# EAGLE board Legoduino_topor (EAGLE 6.0), part 1 of 2
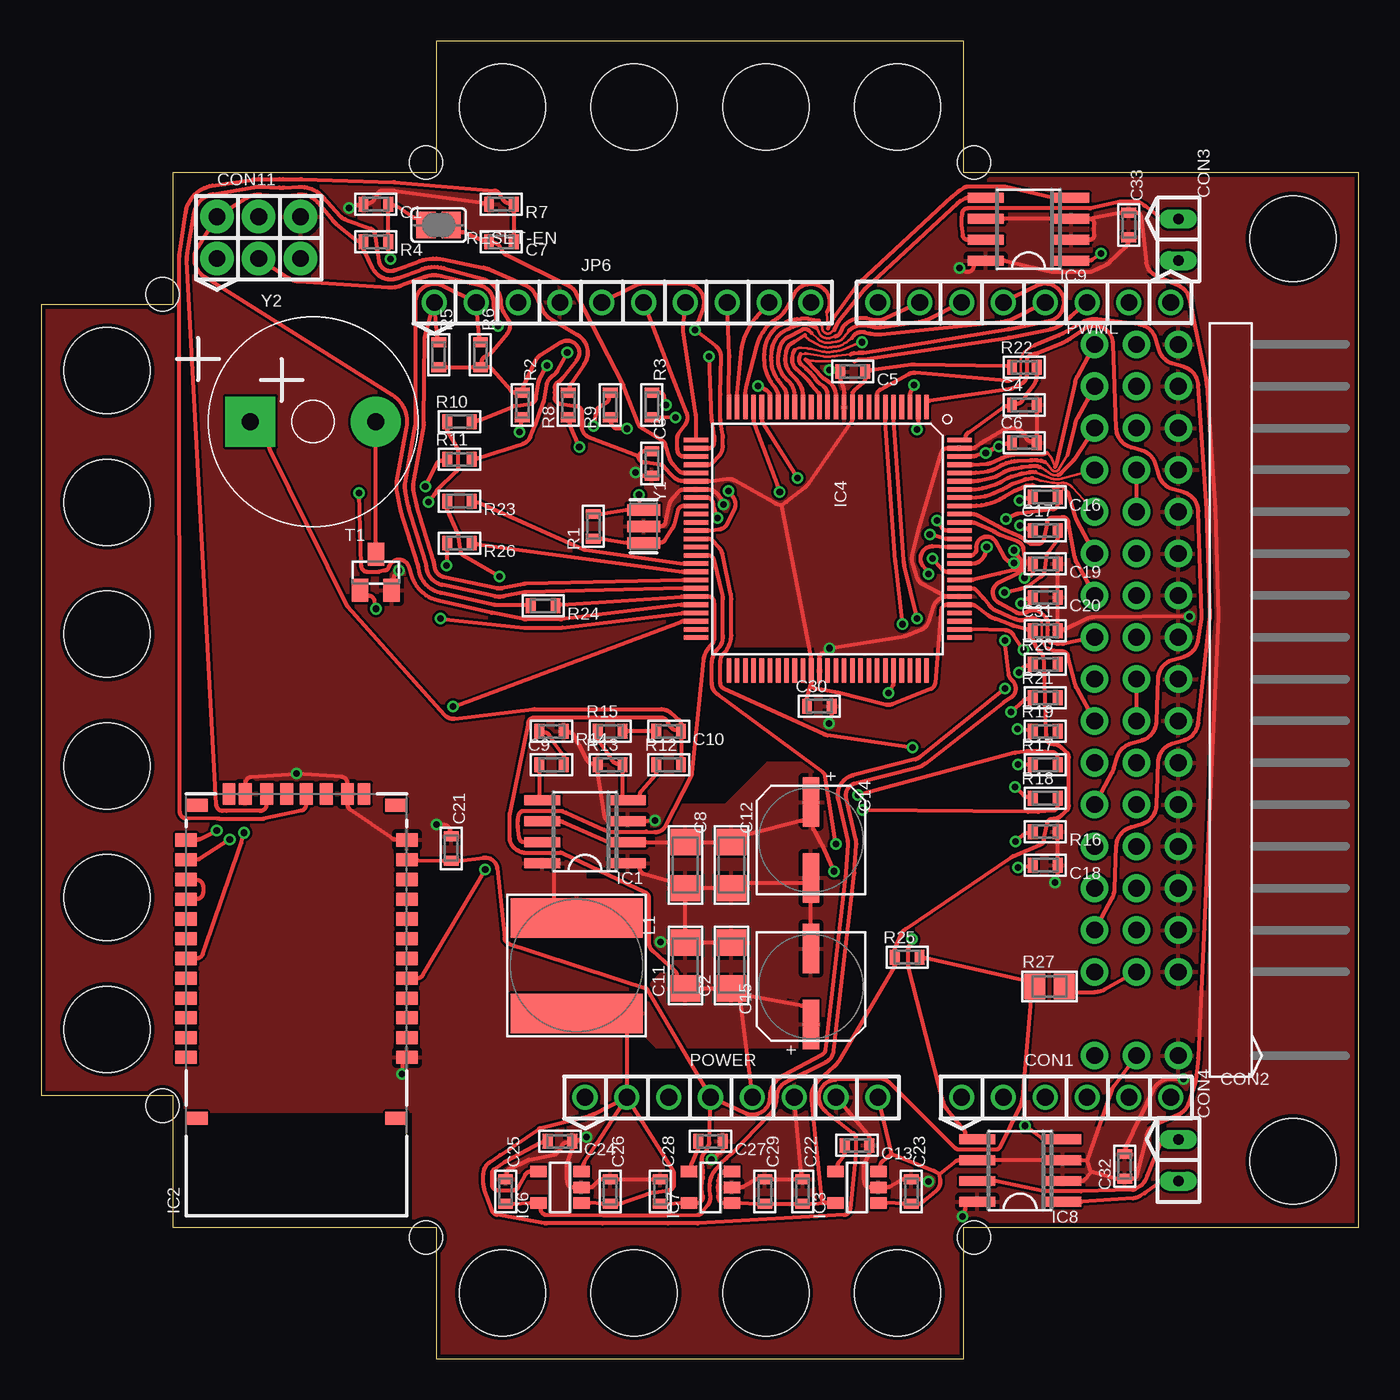
[diagram p0: board, top side]
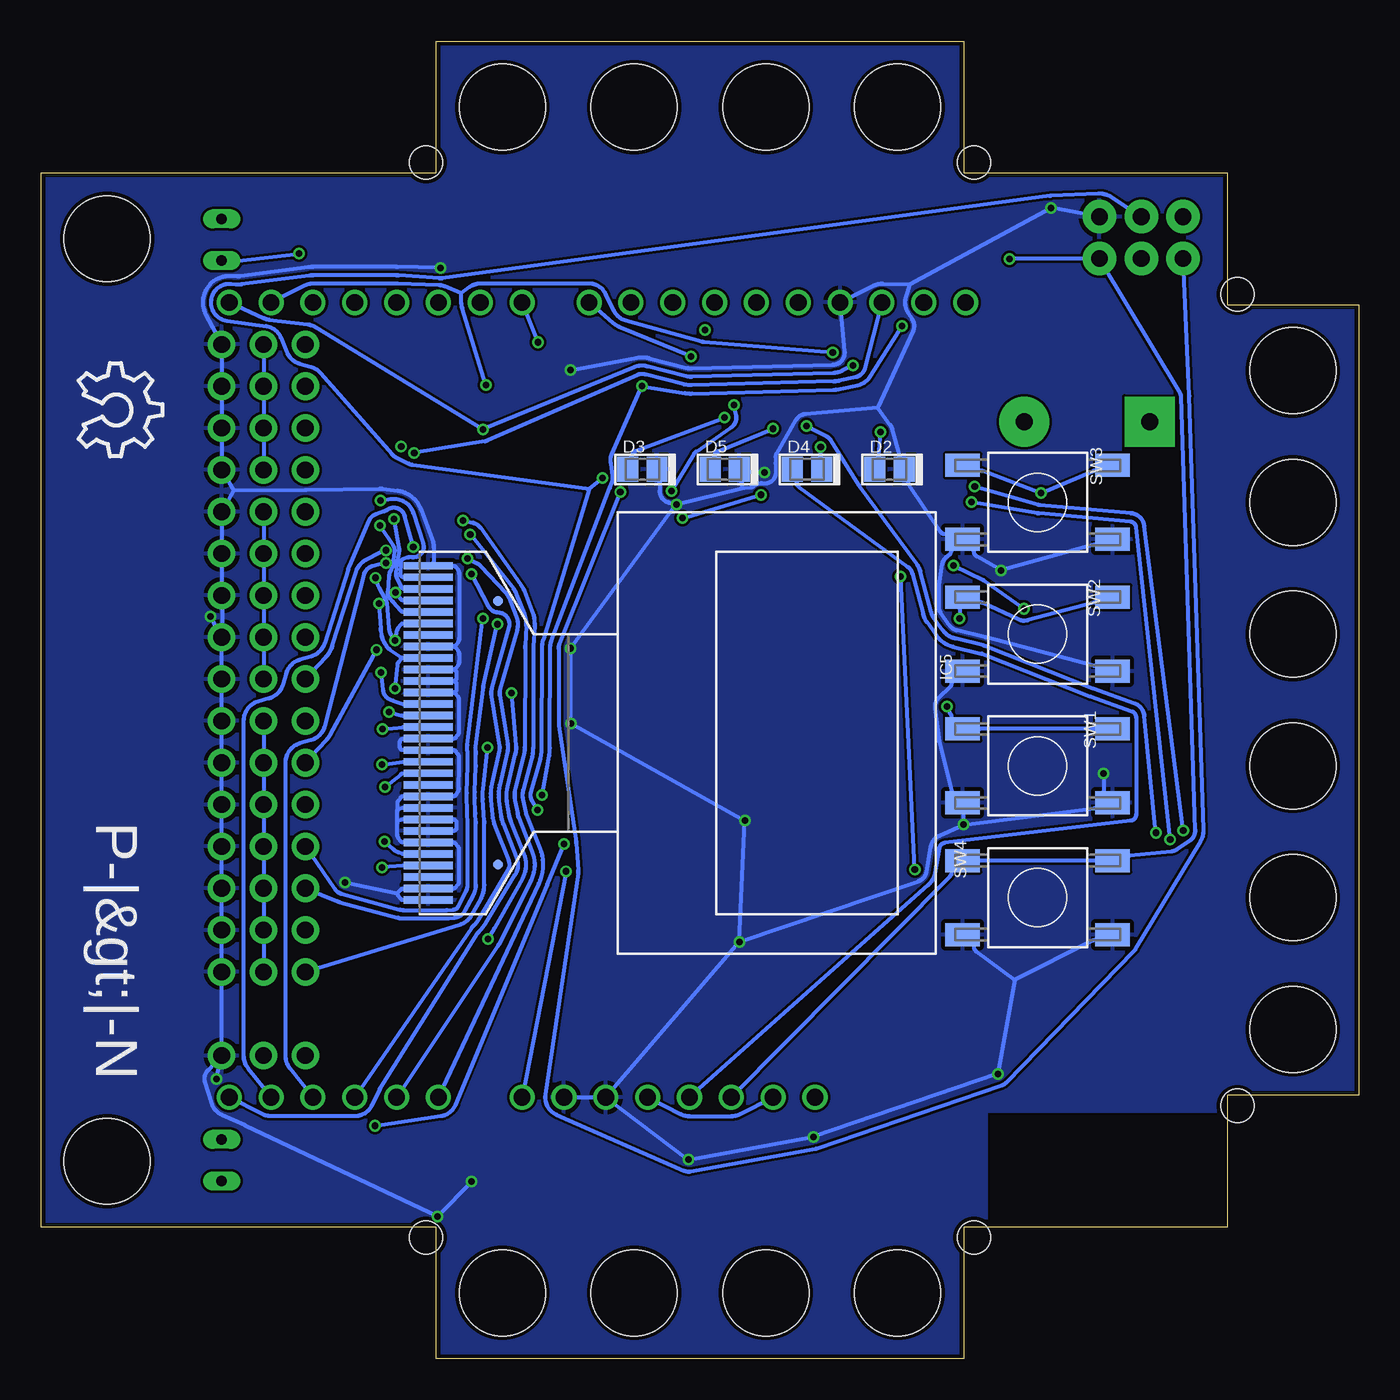
[diagram p1: board, bottom side, seen from below]

Size 80 x 80 mm. Coordinates in mm from the lower left corner, seen from the top.
Outline: 0,16 8,16 8,8 24,8 24,0 56,0 56,8 80,8 80,72 56,72 56,80 24,80 24,72 8,72 8,64 0,64 0,16
Copper layers 1+16: Top 0.035mm / dielectric 0.15mm / Bottom 0.035mm
Design rules: minimum track width 0.1524mm, track to track 0.1524mm, copper to edge 0.254mm, minimum pad ring 0.1mm, minimum via ring 0.1mm
Net classes: 0 default: width 0.152 mm, clearance 0.152 mm
Holes 2 mm at 7.37,64.64 23.36,72.64 56.63,72.64 56.63,7.37 23.36,7.37 7.37,15.37
Holes 5.2 mm at 28,4 36,4 44,4 52,4 4,20 4,28 4,36 4,44 4,52 4,60 28,76 36,76 44,76 52,76 76,68 76,12
tKeepout: area 24,0 to 56,8; area 24,72 to 56,80
bKeepout: area 24,72 to 56,80; area 24,0 to 56,8

## Footprints (pad centres in the part's own frame; a part is rotated, then mirrored left to right if it is on the bottom)
PN_default$ = smd 0.6 x 0.9: 1 -0.75,0; 2 0.75,0
PN_default$' = smd 1.6 x 1.8: 1 -1.4,0; 2 1.4,0
PN_default$'' = smd 3 x 1: + -2.3,0; - 2.3,0
pins$ = drill 1.016 pad 1.524: 1 -6.35,0; 2 -3.81,0; 3 -1.27,0; 4 1.27,0; 5 3.81,0; 6 6.35,0
PN_connector$ = drill 1.016 pad 1.676: 1 -21.59,-2.54; 2 -21.59,0; 3 -21.59,2.54; 4 -16.51,-2.54; 5 -16.51,0; 6 -16.51,2.54; 7 -13.97,-2.54; 8 -13.97,0; 9 -13.97,2.54; 10 -11.43,-2.54; 11 -11.43,0; 12 -11.43,2.54; 13 -8.89,-2.54; 14 -8.89,0; 15 -8.89,2.54; 16 -6.35,-2.54; 17 -6.35,0; 18 -6.35,2.54; 19 -3.81,-2.54; 20 -3.81,0; 21 -3.81,2.54; 22 -1.27,-2.54; 23 -1.27,0; 24 -1.27,2.54; 25 1.27,-2.54; 26 1.27,0; 27 1.27,2.54; 28 3.81,-2.54; 29 3.81,0; 30 3.81,2.54; 31 6.35,-2.54; 32 6.35,0; 33 6.35,2.54; 34 8.89,-2.54; 35 8.89,0; 36 8.89,2.54; 37 11.43,-2.54; 38 11.43,0; 39 11.43,2.54; 40 13.97,-2.54; 41 13.97,0; 42 13.97,2.54; 43 16.51,-2.54; 44 16.51,0; 45 16.51,2.54; 46 19.05,-2.54; 47 19.05,0; 48 19.05,2.54; 49 21.59,-2.54; 50 21.59,0; 51 21.59,2.54
pins$' = drill 0.635 pad 1.143 long: 1 -1.27,0; 2 1.27,0
Pietrucha$ = drill 1.016 pad 2.032: 1 -2.54,-1.27; 2 -2.54,1.27; 3 0,-1.27; 4 0,1.27; 5 2.54,-1.27; 6 2.54,1.27
PN_default$''' = smd 1.27 x 1.524: A -0.889,0; K 0.889,0
PN_IC$ = smd 0.6 x 2.2: 1 -1.905,-2.6; 2 -0.635,-2.6; 3 0.635,-2.6; 4 1.905,-2.6; 5 1.905,2.6; 6 0.635,2.6; 7 -0.635,2.6; 8 -1.905,2.6
PN_modules$ = smd 0.8 x 1.3: 1 -3.2,-6.7; 2 -2,-6.7; 3 -0.8,-6.7; 4 0.4,-6.7; 5 1.6,-6.7; 6 2.8,-6.7; 7 4,-6.7; 8 5.2,-6.7; 9 6.4,-6.7; 10 7.6,-6.7; 11 8.8,-6.7; 12 10,-6.7; 13 10,6.7; 14 8.8,6.7; 15 7.6,6.7; 16 6.4,6.7; 17 5.2,6.7; 18 4,6.7; 19 2.8,6.7; 20 1.6,6.7; 21 0.4,6.7; 22 -0.8,6.7; 23 -2,6.7; 24 -3.2,6.7; P$1 12.1,6.05; P$10 12.1,-6.05; P$35 -6.9,-6.05; P$36 -6.9,6.05 | smd 1.3 x 0.78: 28 12.8,3.1; 29 12.8,-3.1; 30 12.8,4.1; 35 12.8,-4.1 | smd 1.3 x 0.8: 31 12.8,1.8; 32 12.8,0.6; 33 12.8,-0.6; 34 12.8,-1.8
PN_IC$' = smd 0.7 x 1: 1 -0.95,-1.3; 2 0,-1.3; 3 0.95,-1.3; 4 0.95,1.3; 5 -0.95,1.3
PN_microcontrollers$ = smd 1.5 x 0.28: 1 -8,6; 2 -8,5.5; 3 -8,5; 4 -8,4.5; 5 -8,4; 6 -8,3.5; 7 -8,3; 8 -8,2.5; 9 -8,2; 10 -8,1.5; 11 -8,1; 12 -8,0.5; 13 -8,0; 14 -8,-0.5; 15 -8,-1; 16 -8,-1.5; 17 -8,-2; 18 -8,-2.5; 19 -8,-3; 20 -8,-3.5; 21 -8,-4; 22 -8,-4.5; 23 -8,-5; 24 -8,-5.5; 25 -8,-6; 51 8,-6; 52 8,-5.5; 53 8,-5; 54 8,-4.5; 55 8,-4; 56 8,-3.5; 57 8,-3; 58 8,-2.5; 59 8,-2; 60 8,-1.5; 61 8,-1; 62 8,-0.5; 63 8,0; 64 8,0.5; 65 8,1; 66 8,1.5; 67 8,2; 68 8,2.5; 69 8,3; 70 8,3.5; 71 8,4; 72 8,4.5; 73 8,5; 74 8,5.5; 75 8,6 | smd 0.28 x 1.5: 26 -6,-8; 27 -5.5,-8; 28 -5,-8; 29 -4.5,-8; 30 -4,-8; 31 -3.5,-8; 32 -3,-8; 33 -2.5,-8; 34 -2,-8; 35 -1.5,-8; 36 -1,-8; 37 -0.5,-8; 38 0,-8; 39 0.5,-8; 40 1,-8; 41 1.5,-8; 42 2,-8; 43 2.5,-8; 44 3,-8; 45 3.5,-8; 46 4,-8; 47 4.5,-8; 48 5,-8; 49 5.5,-8; 50 6,-8; 76 6,8; 77 5.5,8; 78 5,8; 79 4.5,8; 80 4,8; 81 3.5,8; 82 3,8; 83 2.5,8; 84 2,8; 85 1.5,8; 86 1,8; 87 0.5,8; 88 0,8; 89 -0.5,8; 90 -1,8; 91 -1.5,8; 92 -2,8; 93 -2.5,8; 94 -3,8; 95 -3.5,8; 96 -4,8; 97 -4.5,8; 98 -5,8; 99 -5.5,8; 100 -6,8
PN_opto$ = smd 0.45 x 3: 1 -10.15,-23; 2 -9.45,-23; 3 -8.75,-23; 4 -8.05,-23; 5 -7.35,-23; 6 -6.65,-23; 7 -5.95,-23; 8 -5.25,-23; 9 -4.55,-23; 10 -3.85,-23; 11 -3.15,-23; 12 -2.45,-23; 13 -1.75,-23; 14 -1.05,-23; 15 -0.35,-23; 16 0.35,-23; 17 1.05,-23; 18 1.75,-23; 19 2.45,-23; 20 3.15,-23; 21 3.85,-23; 22 4.55,-23; 23 5.25,-23; 24 5.95,-23; 25 6.65,-23; 26 7.35,-23; 27 8.05,-23; 28 8.75,-23; 29 9.45,-23; 30 10.15,-23 | smd 0.6 x 0.6: ALIGN1 -8,-18.75; ALIGN2 8,-18.75
pins$'' = drill 1.016 pad 1.524: 1 -11.43,0; 2 -8.89,0; 3 -6.35,0; 4 -3.81,0; 5 -1.27,0; 6 1.27,0; 7 3.81,0; 8 6.35,0; 9 8.89,0; 10 11.43,0
PN_inductor$ = smd 2.4 x 8: 1 -2.9,0; 2 2.9,0
pins$''' = drill 1.016 pad 1.524: 1 -8.89,0; 2 -6.35,0; 3 -3.81,0; 4 -1.27,0; 5 1.27,0; 6 3.81,0; 7 6.35,0; 8 8.89,0
PN_default$'''' = smd 1.27 x 1.524: 1 -0.889,0; 2 0.889,0
jumper$ = smd 1.168 x 1.6: 1 -0.762,0; 2 0.762,0
PN_default$''''' = smd 1.4 x 2.1: 1 -2.25,-4.55; 1A -2.25,4.55; 2 2.25,-4.55; 2A 2.25,4.55
PN_default$'''''' = smd 1 x 1.4: 1 -0.95,-1.1; 2 0.95,-1.1; 3 0,1.1
SmartPrj$ = smd 0.7 x 2: 1 -1,0; 2 0,0; 3 1,0
Pietrucha$' = drill 1.016 pad 3.048 square: + -3.81,0 | drill 1.016 pad 3.048: - 3.81,0

## Placement (x,y rotation side)
C1  22p  [PN_default$]  20.32,70.1 180 top
C2  22u  [PN_default$']  41.91,23.88 90 top
C3  100n  [PN_default$]  37.08,54.36 270 top
C4  100n  [PN_default$]  59.69,57.91 0 top
C5  100n  [PN_default$]  49.28,59.94 180 top
C6  100n  [PN_default$]  59.69,55.63 0 top
C7  100n  [PN_default$]  27.94,67.82 180 top
C8  22u  [PN_default$']  39.12,29.97 270 top
C9  3n9  [PN_default$]  30.99,36.07 0 top
C10  150p  [PN_default$]  38.1,38.1 180 top
C11  22u  [PN_default$']  39.12,23.88 90 top
C12  22u  [PN_default$']  41.91,29.97 270 top
C13  470p  [PN_default$]  49.53,12.95 180 top
C14  100u/25V  [PN_default$'']  46.74,31.5 270 top
C15  100u/25V  [PN_default$'']  46.74,22.61 90 top
C16  *  [PN_default$]  60.96,52.32 180 top
C17  *  [PN_default$]  60.96,50.29 0 top
C18  *  [PN_default$]  60.96,29.97 180 top
C19  *  [PN_default$]  60.96,48.26 180 top
C20  *  [PN_default$]  60.96,46.23 180 top
C21  100n  [PN_default$]  24.89,30.99 270 top
C22  2u2  [PN_default$]  46.23,10.16 270 top
C23  1u  [PN_default$]  52.83,10.16 270 top
C24  470p  [PN_default$]  31.5,13.21 180 top
C25  2u2  [PN_default$]  28.19,10.16 270 top
C26  1u  [PN_default$]  34.54,10.16 270 top
C27  470p  [PN_default$]  40.64,13.21 180 top
C28  2u2  [PN_default$]  37.59,10.16 270 top
C29  1u  [PN_default$]  43.94,10.16 270 top
C30  100n  [PN_default$]  47.24,39.62 0 top
C31  100n  [PN_default$]  60.96,44.2 0 top
C32  100n  [PN_default$]  65.79,11.68 90 top
C33  100n  [PN_default$]  66.04,68.83 270 top
CON1  [pins$]  62.23,15.88 0 top
CON2  [PN_connector$]  66.5,40 90 top
CON3  [pins$']  69.04,67.94 270 top
CON4  [pins$']  69.04,12.06 270 top
CON11  ISP-AVR  [Pietrucha$]  13.21,68.07 0 top
D2  PWR  [PN_default$''']  28.5,54 0 bottom
D3  LED  [PN_default$''']  43.5,54 0 bottom
D4  DATA  [PN_default$''']  33.5,54 0 bottom
D5  CONN  [PN_default$''']  38.5,54 0 bottom
IC1  NCP3170ADR2G  [PN_IC$]  33.02,32 90 top
IC2  RN-42  [PN_modules$]  15.5,21.5 90 top
IC3  MIC5205-5.0YM5  [PN_IC$']  49.53,10.41 90 top
IC4  ATMEGA2560-16AU  [PN_microcontrollers$]  47.75,49.78 270 top
IC5  UG-2864HSWEG01_SPI  [PN_opto$]  33.5,38 270 bottom
IC6  MIC5205-3.6YM5  [PN_IC$']  31.5,10.41 90 top
IC7  MIC5205-3.3YM5  [PN_IC$']  40.64,10.41 90 top
IC8  BD6221F-E2  [PN_IC$]  59.44,11.43 90 top
IC9  BD6221F-E2  [PN_IC$]  59.94,68.58 90 top
JP6  [pins$'']  35.31,64.14 0 top
L1  SRN8040-100M  [PN_inductor$]  32.51,23.88 270 top
LOGO1  [ohw-logo$]  77.72,60.45 270 bottom
POWER  [pins$''']  41.91,15.88 0 top
PWML  [pins$''']  59.69,64.14 180 top
R1  1M  [PN_default$]  33.53,50.55 90 top
R2  1k  [PN_default$]  29.21,57.91 270 top
R3  1k  [PN_default$]  37.08,57.91 270 top
R4  10k  [PN_default$]  20.32,67.82 180 top
R5  10k  [PN_default$]  24.13,60.96 270 top
R6  10k  [PN_default$]  26.67,60.96 270 top
R7  1k  [PN_default$]  27.94,70.1 180 top
R8  1k  [PN_default$]  32,57.91 90 top
R9  1k  [PN_default$]  34.54,57.91 90 top
R10  10k  [PN_default$]  25.4,56.9 0 top
R11  10k  [PN_default$]  25.4,54.61 0 top
R12  24k9  [PN_default$]  38.1,36.07 0 top
R13  4k75  [PN_default$]  34.54,36.07 0 top
R14  10k  [PN_default$]  30.99,38.1 180 top
R15  1k  [PN_default$]  34.54,38.1 0 top
R16  390k  [PN_default$]  60.96,32 180 top
R17  10k  [PN_default$]  60.96,36.07 0 top
R18  10k  [PN_default$]  60.96,34.04 0 top
R19  10k  [PN_default$]  60.96,38.1 0 top
R20  10k  [PN_default$]  60.96,42.16 0 top
R21  10k  [PN_default$]  60.96,40.13 0 top
R22  0R  [PN_default$]  59.69,60.2 0 top
R23  10k  [PN_default$]  25.4,52.07 180 top
R24  100k  [PN_default$]  30.48,45.72 180 top
R25  N.C.  [PN_default$]  52.58,24.38 0 top
R26  10k  [PN_default$]  25.4,49.53 180 top
R27  0R  [PN_default$'''']  61.21,22.61 0 top
RESET-EN  [jumper$]  24.13,68.83 180 top
SW1  [PN_default$''''']  19.5,36 270 bottom
SW2  [PN_default$''''']  19.5,44 270 bottom
SW3  [PN_default$''''']  19.5,52 270 bottom
SW4  RST  [PN_default$''''']  19.5,28 270 bottom
T1  [PN_default$'''''']  20.32,47.75 0 top
Y1  [SmartPrj$]  36.58,50.55 270 top
Y2  [Pietrucha$']  16.51,56.9 0 top

## Library data of the parts
C1 C3-C7 C9 C10 C13 C16-C33 R1-R26 = $0603
C2 C8 C11 C12 = $1206
C14 C15 = $CE_SMD6.3
CON1 = $PIN6X1C
CON2 = $PIN(1+16)X3_DS
CON3 CON4 = $PIN2X1B
CON11 = $PIN3X2
D2-D5 = $D0805
IC1 IC8 IC9 = $SO08
IC2 = $RN42
IC3 IC6 IC7 = $SOT23-5
IC4 = $TQFP100
IC5 = $UG-2864HSWEG01
JP6 = $PIN10X1C
L1 = $SRN8040
LOGO1 = $OSHW_10X200_NOTEXT
POWER PWML = $PIN8X1C
R27 = $0805
RESET-EN = $SJ
SW1-SW4 = $MICROSW_SMD
T1 = $SOT23
Y1 = $RESONATOR
Y2 = $BUZZER-HCM

## Nets
0: IC4.2 PWML.1 R10.2
1: IC4.3 PWML.2 R11.2
2: IC4.12 PWML.3
3: IC4.16 PWML.4
4: IC4.13 PWML.5
5: IC4.17 PWML.6
6: IC4.18 PWML.7
7: IC4.14 PWML.8
8: IC4.27 JP6.10
9: IC4.24 JP6.9
10: IC4.25 JP6.8
11: IC4.26 JP6.7
12: IC4.28 JP6.6
13: IC4.29 JP6.5
18: IC4.46 SW3.1 SW3.1A
19: IC1.7 IC4.45 R24.1
20: IC4.44 JP6.2 R6.1
21: IC4.43 JP6.1 R5.1
22: IC4.78
23: CON2.21 IC4.77
24: CON2.18 IC4.1
25: CON2.15 IC4.5
26: CON2.12 IC4.6
27: CON2.9 IC4.7
28: CON2.6 IC4.38
29: IC4.71 IC8.5
38: IC4.37 R3.1
42: IC4.42 R26.1
43: IC4.41 R23.1
44: IC4.40 IC8.4
46: IC4.23 IC9.4
50: CON11.1 IC4.22
51: CON11.4 IC4.21 R18.2
52: CON11.3 IC4.20 R17.2
70: R19.2
71: IC4.19 IC9.5
72: R20.2
73: R21.2
74: IC4.47 SW2.1 SW2.1A
75: IC4.48 SW1.1 SW1.1A
+3V3: C20.2 C21.2 C28.2 D4.A IC2.11 IC5.9 IC7.5 POWER.4
+3V6: C19.2 C25.2 IC5.6 IC6.5
+5V: C3.1 C5.1 C22.2 C29.2 C30.1 C31.1 CON11.2 IC3.5 IC4.10 IC4.31 IC4.61 IC4.80 IC7.1 IC7.3 R2.1 R4.2 R5.2 R6.2 R22.1 R24.2 R25.1
+5VP: C2.1 C10.1 C11.1 C15.+ C26.2 IC6.1 IC6.3 L1.2 POWER.2 POWER.5 R12.2 R25.2 R27.1 Y2.+
+5VP_O: CON2.5 CON2.8 CON2.11 CON2.14 CON2.17 CON2.20 CON2.23 CON2.26 CON2.29 CON2.32 CON2.35 CON2.38 CON2.41 CON2.44 CON2.47 CON2.50 R27.2
ADC0: CON1.1 IC4.89
ADC1: CON1.2 IC4.88
ADC2: CON1.3 IC4.87
ADC3: CON1.4 IC4.86
ADC4: CON1.5 IC4.85
ADC5: CON1.6 IC4.84
ADC6: CON2.27 IC4.83
ADC7: CON2.24 IC4.82
ADC8: CON2.51 IC4.97
ADC9: CON2.48 IC4.96
ADC10: CON2.45 IC4.95
ADC11: CON2.42 IC4.94
ADC12: CON2.39 IC4.93
ADC13: CON2.36 IC4.92
ADC14: CON2.33 IC4.91
ADC15: CON2.30 IC4.90
AREF: C6.1 IC4.98 JP6.3
AVCC: C4.1 IC4.100 R22.2
DTR: C7.1 IC2.33 R7.1
GND: C1.2 C2.2 C3.2 C4.2 C5.2 C6.2 C8.2 C11.2 C12.2 C13.1 C14.- C15.- C18.1 C19.1 C20.1 C21.1 C22.1 C23.1 C24.1 C25.1 C26.1 C27.1 C28.1 C29.1 C30.2 C31.2 C32.2 C33.2 CON2.1 CON2.4 CON2.7 CON2.10 CON2.13 CON2.16 CON2.19 CON2.22 CON2.25 CON2.28 CON2.31 CON2.34 CON2.37 CON2.40 CON2.43 CON2.46 CON2.49 CON11.6 D2.K D3.K D5.K IC1.1 IC1.3 IC2.1 IC2.12 IC2.28 IC2.29 IC3.2 IC4.11 IC4.32 IC4.62 IC4.81 IC4.99 IC5.1 IC5.8 IC5.10 IC5.11 IC5.12 IC5.16 IC5.17 IC5.21 IC5.22 IC5.23 IC5.24 IC5.25 IC5.29 IC5.30 IC6.2 IC7.2 IC8.8 IC9.8 JP6.4 POWER.6 POWER.7 R7.2 R13.1 R14.1 R16.1 SW1.2 SW1.2A SW2.2 SW2.2A SW3.2 SW3.2A SW4.2 SW4.2A T1.2 Y1.2
GND1: IC1.4 R12.1 R13.2 R15.1
N$1: IC2.14 R10.1
N$2: D3.A R3.2
N$3: D2.A R2.2
N$4: IC2.13 R11.1
N$5: IC2.31 R8.2
N$6: D4.K R8.1
N$7: D5.A R9.1
N$8: IC2.19 R9.2
N$9: C18.2 IC5.27
N$10: C9.1 IC1.5
N$11: C9.2 R14.2
N$12: IC5.26 R16.2
N$13: C10.2 R15.2
N$14: C16.1 IC5.3
N$15: C17.2 IC5.4
N$16: C16.2 IC5.2
N$17: C17.1 IC5.5
N$18: IC5.13 R20.1
N$19: IC5.15 R19.1
N$20: IC5.18 R17.1
N$21: IC5.19 R18.1
N$22: IC2.15 IC2.16
N$23: IC5.14 R21.1
N$24: C13.2 IC3.4
N$25: T1.3 Y2.-
N$26: R26.2 T1.1
N$27: IC2.5 R23.2
N$28: C24.2 IC6.4
N$29: CON3.2 IC9.1
N$30: CON4.2 IC8.1
N$31: C27.2 IC7.4
N$32: CON3.1 IC9.7
N$33: CON4.1 IC8.7
OC_PWM1: IC4.15
OC_PWM2: IC4.39
RESET: C1.1 C7.2 CON11.5 IC4.30 POWER.3 R4.1 RESET-EN.1 RESET-EN.2 SW4.1 SW4.1A
SW: IC1.8 L1.1
VCC: IC5.28
VIN: C8.1 C12.1 C14.+ C23.2 C32.1 C33.1 CON2.2 IC1.2 IC1.6 IC3.1 IC3.3 IC8.2 IC8.3 IC8.6 IC9.2 IC9.3 IC9.6 POWER.8
XTAL1: IC4.34 R1.1 Y1.3
XTAL2: IC4.33 R1.2 Y1.1

## Tracks (layer width: path | path; a pad name or v marks a point on that pad's centre or on a via)
0  (via drill 0.4 pad 0.7)
  Top 0.254: IC4.2 53.25,57.16 53.25,57.03 arc-7 53.25,56.99 v53.18,56.43 | R10.2 26.32,56.97 26.45,56.97 arc22 26.59,56.99 28.62,57.81 arc-14 28.71,57.84 29.71,57.98 arc73 30.04,58.3 30.17,59.18 arc-19 30.32,59.63 v30.7,60.32
  Bottom 0.254: v30.7,60.32 31.39,59.98 arc25 31.91,59.85 40.52,59.62 arc16 40.85,59.66 43.23,60.26 arc-37 44,60.21 v53.18,56.43 63.32,62.63 arc-24 63.81,62.8 66.17,63.09 arc17 66.47,63.18 PWML.1
1  (via drill 0.4 pad 0.7)
  Top 0.254: IC4.3 52.75,58.41 52.75,58.53 arc-26 52.79,58.69 v53,59.13 | R11.2 26.32,54.68 26.45,54.68 arc18 26.57,54.7 29.25,55.56 arc50 29.7,55.98 30.01,56.72 arc3 30.02,56.73 30.5,58.06 arc10 30.54,58.21 30.69,59.11 arc-48 31.08,59.7 31.09,59.71 arc29 31.34,59.98 v31.94,61.09
  Bottom 0.254: 54.51,64.71 55.48,65.11 arc-20 55.84,65.18 58.38,65.28 arc-2 58.42,65.28 63.5,65.28 arc-27 64.01,65.16 PWML.2 | v31.94,61.09 39.76,61.73 arc11 39.9,61.76 44.5,63.03 arc49 45.23,63.64 45.71,64.63 arc-64 46.74,65.28 53.34,65.28 arc-35 54,65.07 54.51,64.71 | v53,59.13 54.43,63.8 arc14 54.48,64.08 54.51,64.71
2
  Top 0.152: 46.42,60.67 arc-5 46.61,60.63 46.62,60.63 arc12 47.03,60.58 47.71,60.56 arc10 48.05,60.58 48.2,60.6 arc-7 48.22,60.6 48.82,60.62 arc-8 48.85,60.62 49.1,60.59 49.39,60.56
  Top 0.254: 49.39,60.56 49.61,60.66 arc-28 49.75,60.68 arc13 49.98,60.69 58.74,62 arc3 58.85,62.02 61.29,62.52 arc29 62.04,62.88 62.5,63.28 arc0 62.51,63.29 PWML.3 | IC4.12 48.25,58.41 48.25,58.53 arc11 48.24,58.66 48.23,58.7 arc34 48,59.14 47.86,59.28 arc18 47.59,59.48 | 47.59,59.48 | 47.59,59.48 arc-20 47.41,59.61 46.55,60.54 arc4 46.42,60.67
3
  Top 0.152: 46.37,62.17 46.37,62.17 arc27 46.47,62 arc16 46.66,61.85 47.18,61.55 arc40 47.97,61.42 47.97,61.42 arc-1 48,61.43 48.06,61.44 arc-2 48.1,61.44 48.28,61.46 arc23 48.66,61.58 48.77,61.65 arc15 49.23,61.99
  Top 0.254: 49.23,61.99 49.34,62.12 arc-65 49.98,62.34 50.33,62.25 arc20 51,62.2 58.54,63 arc21 58.93,63.11 PWML.4 | IC4.16 46.25,58.41 46.25,58.53 arc36 46.03,59.2 45.86,59.44 arc7 45.74,59.59 45.52,59.82 arc-51 45.2,60.84 45.24,61.12 arc-28 45.39,61.52 | 45.39,61.52 | 45.39,61.52 arc-26 45.54,61.65 | 45.54,61.65 | 45.54,61.65 arc4 45.73,61.76 46.37,62.17
4
  Top 0.152: 46.11,61 46.37,61.03 arc-16 46.47,61.03 arc-1 46.54,61.02 47.47,60.87 arc18 48.02,60.86 48.15,60.88 arc-4 48.19,60.88 48.3,60.89 arc1 48.32,60.9 arc1 48.34,60.9 49.14,60.99
  Top 0.254: 49.14,60.99 arc-25 49.34,61.05 49.66,61.09 arc-10 49.78,61.09 49.78,61.09 arc14 49.93,61.09 58.68,62.51 arc2 58.75,62.52 61.19,63.02 arc195 60.45,65.16 PWML.5 | IC4.13 47.75,58.41 47.75,58.53 arc54 47.49,59.05 47.27,59.22 arc-20 47.03,59.47 47.02,59.47 arc3 46.97,59.55 46.89,59.66 arc9 46.7,59.88 46.55,60.02 arc4 46.45,60.11 46.16,60.36 arc-71 46.04,60.82 46.11,61
5
  Top 0.152: 46.77,62.29 arc2 46.78,62.28 47.15,61.93 arc54 47.92,61.7 47.92,61.7 arc-1 47.94,61.7 48.01,61.71 arc-2 48.06,61.72 48.25,61.74 arc45 48.74,62.02 49.06,62.43
  Top 0.254: 49.06,62.43 arc-58 50.03,62.75 50.52,62.66 arc19 51.02,62.64 53.5,63 arc19 53.85,63.11 PWML.6 | IC4.17 45.75,58.41 45.75,58.53 arc13 45.73,58.68 45.71,58.79 arc37 45.34,59.39 | 45.34,59.39 | 45.34,59.39 arc-57 44.76,60.88 44.8,61.17 arc-28 45.04,61.77 | 45.04,61.77 | 45.04,61.77 arc-26 45.34,62.04 46.2,62.49 arc-71 46.62,62.43 46.77,62.29
6
  Top 0.152: 47.08,62.59 47.21,62.31 arc82 47.94,61.99 48.2,62.07
  Top 0.254: 48.2,62.07 48.24,62.08 arc-1 48.27,62.09 48.28,62.1 arc42 48.5,62.27 48.5,62.28 arc7 48.58,62.43 48.66,62.61 arc-19 48.74,62.73 arc-58 50.12,63.18 50.59,63.08 arc36 51.25,63.16 PWML.7 | IC4.18 45.25,58.41 45.25,58.53 arc36 45.13,58.91 44.88,59.26 arc4 44.82,59.32 arc-44 44.33,60.79 44.35,61.1 arc-32 44.68,62.03 44.68,62.03 arc-27 45.16,62.44 45.45,62.59 arc-12 45.87,62.74 46.2,62.83 arc-40 46.66,62.79 46.94,62.66 arc-5 46.97,62.64 46.98,62.64 arc8 47.04,62.61 47.08,62.59
7  (via drill 0.4 pad 0.7)
  Top 0.152: 45.75,61.26 45.92,61.35 arc-35 46.16,61.4 46.51,61.35 arc-1 46.52,61.35 arc-4 46.71,61.31 47.45,61.15 arc21 47.99,61.14 48.1,61.16 arc-3 48.15,61.16 48.29,61.18 arc17 48.66,61.27 arc0 48.67,61.28 49.5,61.63 arc-14 v49.83,61.72
  Top 0.254: IC4.14 47.25,58.41 47.25,58.53 arc41 47.22,58.62 | 47.22,58.62 | 47.22,58.62 arc-1 47.21,58.63 46.8,59.12 arc-7 46.7,59.25 46.7,59.26 arc14 46.49,59.5 45.87,60.07 arc-60 45.62,60.85 45.68,61.1 arc-23 45.75,61.26
  Bottom 0.254: v49.83,61.72 PWML.8
8  (via drill 0.4 pad 0.7)
  Top 0.254: IC4.27 40.38,55.28 40.5,55.28 arc81 40.86,55.59 40.88,55.73 arc9 40.88,55.78 40.88,55.92 arc9 40.88,55.98 40.73,56.9 arc-6 40.72,56.99 v40.55,60.86
  Bottom 0.254: v40.55,60.86 44.82,62.61 arc18 45.27,62.88 JP6.10
9
  Top 0.254: IC4.24 42.25,58.41 42.25,58.53 arc-6 42.26,58.62 42.5,61.06 arc-35 43.42,63.23 JP6.9
10
  Top 0.254: IC4.25 41.75,58.41 41.75,58.53 arc-1 41.75,58.56 41.79,60.84 arc3 41.79,60.91 JP6.8
11
  Top 0.254: IC4.26 39.76,55.8 39.76,55.92 39.76,57.15 arc9 39.74,57.34 38.98,62.35 arc-14 38.97,62.52 JP6.7
12
  Top 0.254: IC4.28 39.13,54.78 39,54.78 arc-81 38.65,55.09 38.62,55.23 arc-9 38.62,55.28 38.62,55.92 arc-36 38.69,56.15 39.11,56.72 arc57 39.2,57.42 JP6.6
13  (via drill 0.4 pad 0.7)
  Top 0.254: JP6.5 36.06,65.16 arc-27 36.58,65.28 39.12,65.28 arc-111 40.18,63.73 v39.7,62.46 41,61.43 arc-53 41.28,60.84 41.23,58.58 arc1 41.23,58.53 41.23,57.03 arc9 41.24,56.97 41.38,56.06 arc-9 41.39,55.92 41.39,55.42 arc-43 41.16,54.82 40.77,54.4 arc-47 40.5,54.28 40.38,54.28 IC4.29
18  (via drill 0.4 pad 0.7)
  Top 0.254: IC4.46 39.13,45.78 39,45.78 arc7 38.84,45.77 31.58,44.89 arc-7 31.53,44.89 29.43,44.89 arc-11 29.36,44.9 27.38,45.29 arc-2 27.32,45.3 24.11,46.03 arc-59 22.52,47.48 22.34,48.07 arc145 21.1,48.06 | 21.1,48.06 | 21.1,48.06 arc-60 20.89,47.86 20.52,47.78 arc-13 20.44,47.77 19.82,47.77 arc-88 19.44,48.14 v19.3,52.56
  Bottom 0.254: SW3.1 23.13,53.93 23,53.93 arc21 22.86,53.91 v19.3,52.56 16.15,53.9 arc23 16,53.93 15.87,53.93 SW3.1A
19
  Top 0.254: R24.1 31.4,45.79 31.53,45.79 arc4 31.55,45.79 38.88,46.28 arc-4 39,46.28 39.13,46.28 IC4.45 40.38,46.28 40.5,46.28 arc-81 40.86,45.98 40.88,45.84 arc-9 40.88,45.78 40.88,43.92 40.88,43.78 arc-20 40.86,43.65 40.81,43.53 arc-24 40.73,43.41 40.73,43.41 arc7 40.63,43.3 40.51,43.14 arc32 40.22,42.42 39.53,35.58 arc-21 39.49,35.44 37.91,32.36 arc-66 37.24,31.97 36.74,32 arc3 36.72,32 34.52,32 arc-23 34.39,32.03 34.18,32.12 arc-2 34.16,32.13 31.89,33.15 arc2 31.86,33.16 31.65,33.25 arc23 31.52,33.27 29.32,33.27 arc81 28.99,32.99 28.94,32.7 arc9 28.94,32.64 28.94,32.34 arc7 28.94,32.29 29.02,31.63 arc83 29.32,31.37 29.45,31.37 IC1.7
20
  Top 0.254: IC4.44 39.13,46.78 39,46.78 arc1 38.96,46.78 29.42,46.55 arc10 29.36,46.54 28.06,46.28 arc-24 27.56,46.29 24.35,46.98 arc-72 23.4,48.04 | 23.4,48.04 | 23.4,48.04 arc11 23.34,48.37 22.33,51.65 arc-6 22.3,51.76 22.11,52.7 arc-22 22.1,53.17 22.7,56.47 arc10 22.73,56.9 22.73,64.14 arc-117 24.39,65.16 JP6.2 26.6,62.04 arc-5 26.6,62.01 26.6,61.88 R6.1
21
  Top 0.254: IC4.43 39.13,47.28 39,47.28 arc1 38.95,47.28 29.41,47.06 arc10 29.26,47.04 27.96,46.78 arc-23 27.67,46.78 24.45,47.46 arc-72 23.89,48.09 arc11 23.81,48.5 22.81,51.8 arc-5 22.79,51.87 22.6,52.8 arc-22 22.6,53.08 23.2,56.38 arc10 23.24,56.86 23.3,62.01 arc-15 23.31,62.11 JP6.1 24.06,62.04 arc-5 24.06,62.01 24.06,61.88 R5.1
23  (via drill 0.4 pad 0.7)
  Top 0.254: v59.64,43.05 59.03,43.96 arc55 58.52,44.24 56.51,44.28 56.5,44.28 56.38,44.28 IC4.77
  Bottom 0.254: CON2.21 62.69,37.56 arc-14 62.44,37.9 v59.64,43.05
24
  Top 0.254: CON2.18 65.03,35.6 arc12 65.13,35.85 65.33,36.53 arc-57 66.16,37.36 66.84,37.56 arc71 67.72,38.68 67.82,41.32 arc-71 68.7,42.44 69.38,42.64 arc65 70.25,43.62 70.45,44.97 arc11 70.46,45.1 70.26,51.47 arc72 69.38,52.6 68.7,52.8 arc-57 67.87,53.63 67.67,54.31 arc57 66.84,55.14 66.16,55.34 arc-72 65.28,56.46 65.08,61.63 arc122 63.33,62.52 62.46,61.93 arc-12 61.98,61.67 60.5,61.06 arc-10 60.42,61.03 60.36,61.02 arc5 60.33,61.01 60.05,60.93 arc73 59.85,60.65 59.85,59.75 arc-53 59.6,59.26 59.41,59.12 arc-15 59.23,59.01 58.97,58.92 arc-10 58.89,58.89 58.82,58.88 arc-3 58.77,58.87 53.95,58.16 arc-8 53.89,58.15 53.77,58.15 IC4.1
25  (via drill 0.4 pad 0.7)
  Top 0.254: v53.18,44.96 52.41,48.19 arc-9 52.37,48.47 51.75,57.01 arc-4 51.75,57.03 51.75,57.16 IC4.5
  Bottom 0.254: CON2.15 62.16,28.51 arc-40 61.75,28.22 58.22,27.27 arc-15 58,27.24 55.38,27.24 arc-3 55.36,27.25 54.98,27.27 arc-59 54.68,27.46 54.21,28.37 arc-27 54.11,28.77 54.11,32.52 arc-3 54.11,32.58 54.14,33.07 arc2 54.15,33.24 54.16,34.15 arc3 54.16,34.37 54.11,36 arc-2 54.11,36.02 54.11,36.73 arc-6 54.12,36.81 54.13,36.99 arc13 54.13,37.26 v53.18,44.96
26  (via drill 0.4 pad 0.7)
  Top 0.254: v52.3,44.6 51.87,48.33 arc-3 51.86,48.43 51.25,56.97 arc-4 51.25,57.03 51.25,57.16 IC4.6
  Bottom 0.254: CON2.12 62.03,27.78 arc-7 61.88,27.73 58.35,26.78 arc-15 58,26.74 55.38,26.74 arc-6 55.28,26.74 54.91,26.78 arc-55 54.26,27.22 53.77,28.11 arc-29 53.6,28.77 53.6,32.52 arc-3 53.6,32.6 53.63,33.1 arc1 53.63,33.14 53.67,34.05 arc5 53.67,34.42 53.6,35.96 arc-3 53.6,36.02 53.6,36.73 arc-6 53.61,36.87 53.63,37.04 arc13 53.62,37.2 53.17,40.66 arc5 53.15,40.81 v52.3,44.6
27
  Top 0.152: 60.31,61.53 60.04,61.39 arc8 59.94,61.32 59.75,61.18 arc53 59.48,60.65 59.48,59.75 arc-73 59.31,59.52 59.04,59.43 arc-8 58.99,59.42 58.79,59.39
  Top 0.254: 58.79,59.39 58.72,59.38 arc-17 58.61,59.37 53.06,59.86 arc33 52.65,59.77 50.94,58.85 arc62 50.75,58.53 50.75,58.41 IC4.7 | CON2.9 65.03,27.98 arc26 65.18,28.52 65.28,31.16 arc-71 66.16,32.28 66.84,32.48 arc71 67.72,33.6 67.82,36.24 arc-71 68.7,37.36 69.38,37.56 arc67 70.25,38.59 70.96,44.94 arc8 70.97,45.12 70.77,51.48 arc2 70.76,51.55 70.26,59.13 arc70 69.38,60.22 68.7,60.42 arc-57 67.87,61.25 67.67,61.93 arc67 66.65,62.8 64.15,63.12 arc37 63.2,62.93 62.03,62.26 arc-7 61.78,62.14 60.31,61.53
28  (via drill 0.4 pad 0.7)
  Top 0.254: v52.9,37.11 47.73,37.86 arc-16 47.54,37.91 41.45,40.69 arc-66 41.23,41.03 41.23,42.28 arc-12 41.24,42.36 41.29,42.6 arc-36 41.39,42.78 41.4,42.78 arc25 41.74,43.26 41.79,43.38 arc23 41.9,43.92 41.9,46.14 arc12 41.87,46.43 41.37,48.83 arc31 41.16,49.25 40.77,49.67 arc47 40.5,49.78 40.38,49.78 IC4.38
  Bottom 0.254: CON2.6 54.61,26.35 arc-43 53.84,26.96 53.35,27.83 arc-30 53.09,28.77 53.09,32.52 arc-4 53.1,32.65 53.19,33.99 arc10 53.17,34.62 v52.9,37.11
29  (via drill 0.4 pad 0.7)
  Top 0.254: v51.44,40.43 51.7,40.84 arc32 51.75,41.03 51.75,41.16 IC4.71 | IC8.5 56.12,13.51 56.12,13.63 arc39 56.03,13.88 54.99,15.15 arc-25 54.77,15.59 52.66,23.84 arc-14 52.65,23.93 52.65,24.83 arc-22 52.67,24.98 v52.88,25.48
  Bottom 0.254: v52.88,25.48 52.49,26.12 arc-1 52.46,26.19 50.77,29.16 arc-51 50.67,30.63 51.48,32.66 arc13 51.59,33.04 51.72,33.9 arc23 51.68,34.75 51.2,36.69 arc-19 51.16,37.26 v51.44,40.43
38  (via drill 0.4 pad 0.7)
  Top 0.254: v37.94,57.91 37.83,58.43 arc78 37.53,58.66 37.41,58.66 R3.1 | IC4.37 40.38,50.28 40.5,50.28 arc6 40.54,50.29 41.14,50.35 arc57 41.68,50.73 42.09,51.56 arc64 42.01,52.33 v41.72,52.7
  Bottom 0.254: v41.72,52.7 40.35,54.96 arc24 40.24,55.08 38.1,56.55 arc-68 37.81,57.31 v37.94,57.91
42
  Top 0.254: R26.1 26.32,49.46 26.45,49.46 arc-8 26.5,49.46 38.92,47.79 arc8 39,47.78 39.13,47.78 IC4.42
43
  Top 0.254: R23.1 26.32,52 26.45,52 arc-24 26.61,51.97 32.92,49.15 arc16 33.02,49.12 38.98,48.28 arc8 39,48.28 39.13,48.28 IC4.41
44  (via drill 0.4 pad 0.7)
  Top 0.254: v48.25,31.26 47.61,35.35 arc45 47.46,35.6 41.08,40.32 arc-54 40.72,41.03 40.72,42.28 arc-24 40.8,42.64 40.9,42.86 arc-21 41.06,43.09 41.13,43.16 arc43 41.38,43.75 41.39,43.89 arc2 41.39,43.92 41.39,46.14 arc13 41.37,46.35 40.85,48.51 arc77 40.5,48.78 40.38,48.78 IC4.40 | IC8.4 61.06,13.34 60.94,13.34 arc-36 60.76,13.39 v59.72,14.15
  Bottom 0.254: v59.72,14.15 55.71,14.74 arc-59 54.83,15.44 49.28,28.76 arc0 49.27,28.78 v48.25,31.26
46
  Top 0.152: 47.71,63.55 47.76,62.63 arc-5 47.76,62.57
  Top 0.254: IC9.4 61.57,70.48 61.44,70.48 arc-13 61.38,70.49 58.53,71.16 arc13 58.44,71.17 56.24,71.17 arc32 56.04,71.11 55.77,70.94 arc9 55.66,70.86 55.33,70.57 arc2 55.3,70.54 49.68,65.35 arc12 49.46,65.1 48.06,63.14 arc11 47.94,62.94 47.85,62.74 arc-6 47.82,62.67 arc2 47.81,62.66 47.76,62.57 | IC4.23 42.75,58.41 42.75,58.53 arc-9 42.76,58.59 42.84,59.16 arc-6 42.86,59.23 43.43,61.45 arc-26 44.08,62.69 44.09,62.69 arc-21 44.71,63.19 | 44.71,63.19 | 44.71,63.19 arc32 45.13,63.61 45.75,64.69 arc-181 47.71,63.55
50  (via drill 0.4 pad 0.7)
  Top 0.254: IC4.22 43.25,57.16 43.25,57.03 arc20 43.31,56.73 v44.84,52.63
  Bottom 0.254: v44.84,52.63 48.54,43.41 arc-22 48.59,43.14 48.57,38.58 arc-8 48.56,38.47 47.53,31.37 arc4 47.52,31.31 47.4,29.65 arc13 47.41,29.49 49.39,16.04 arc-75 48.72,14.83 40.99,11.43 arc-34 40.57,11.38 32.99,12.75 arc-9 32.88,12.78 21.67,16.61 arc-27 21.39,16.79 13.63,24.79 arc-13 13.57,24.85 9.6,31.43 arc-33 9.42,32.11 10.29,58.45 arc-1 10.29,58.46 CON11.1
51  (via drill 0.4 pad 0.7)
  Top 0.254: R18.2 61.71,33.71 61.71,33.59 arc-85 61.44,33.29 60.54,33.21 arc-5 60.51,33.2 59.91,33.2 v49.86,33.31 | IC4.21 43.75,57.16 43.75,57.03 arc32 43.81,56.84 v45.92,53.47
  Bottom 0.254: 46.71,52.82 v45.92,53.47 | 46.71,52.82 49.53,43.65 arc-17 49.61,43.15 49.63,37.1 arc16 49.76,36.21 50.27,34.42 arc-47 50.2,33.87 v49.86,33.31 | CON11.4 14.98,70.51 arc-36 15.81,70.74 18.71,70.61 arc-5 18.78,70.6 55.67,65.6 arc12 55.81,65.59 58.3,65.78 arc-4 58.42,65.79 63.5,65.79 arc-7 63.72,65.77 67.85,65.23 arc13 68.17,65.22 68.48,65.25 arc-177 68.73,63.02 66.35,62.7 arc60 65.46,62.02 65.08,61.12 arc-51 64.3,60.42 63.62,60.22 arc32 63.05,59.86 58.69,54.91 arc-22 58.46,54.73 57.67,54.34 arc-19 57.45,54.28 46.71,52.82
52  (via drill 0.4 pad 0.7)
  Top 0.254: v27.73,62.71 27.5,63.84 arc-11 27.47,64.14 arc77 26.66,65.16 24.26,65.74 arc34 23.31,65.69 21.82,65.14 arc-24 21.1,65.04 15.65,65.41 arc-29 14.98,65.64 CON11.3 | R17.2 61.71,36.39 61.71,36.52 arc85 61.44,36.82 60.54,36.9 arc5 60.51,36.9 59.91,36.9 arc8 59.86,36.9 59.2,36.8 arc7 59.11,36.79 v49.59,34.23 | IC4.20 44.25,58.41 44.25,58.53 arc42 44.22,58.63 44.12,58.74 arc17 44.05,58.79 43.94,58.86 arc5 43.92,58.87 v43.53,59.06
  Bottom 0.254: v27.73,62.71 29.65,59.66 arc46 30.44,59.11 31.46,58.89 arc11 31.88,58.84 40.49,58.61 arc11 40.91,58.63 v43.53,59.06 45.37,54.92 arc-24 45.41,54.76 45.41,54.38 arc-8 45.4,54.33 45.3,53.58 45.3,53.57 | v49.59,34.23 49.18,36.42 arc-10 49.12,37.1 49.1,43.15 arc21 49.02,43.58 45.48,52.87 45.48,52.88 45.34,53.24 arc-31 45.3,53.57 | 45.3,53.57
71
  Top 0.152: 47.21,63.03 47.37,62.77 arc-22 47.42,62.65 47.44,62.52 arc119 47.96,62.31 48.16,62.47
  Top 0.254: IC9.5 56.37,70.48 56.24,70.48 arc28 56.1,70.45 55.82,70.3 arc14 55.64,70.17 50.02,64.97 arc9 49.91,64.85 48.4,62.95 arc15 48.29,62.76 48.16,62.47 | IC4.19 44.75,58.41 44.75,58.53 arc24 44.74,58.59 44.62,58.86 arc12 44.53,59.01 44.41,59.17 arc-36 43.91,60.66 43.91,60.99 arc-36 44.33,62.29 | 44.33,62.29 | 44.33,62.29 arc-30 45.02,62.86 45.23,62.95 arc-18 45.88,63.13 46.16,63.16 arc-4 46.32,63.17 46.33,63.17 arc-13 46.55,63.15 47.16,63.04 arc-6 47.21,63.03
74  (via drill 0.4 pad 0.7)
  Top 0.254: v24.24,44.94 29.33,44.39 arc6 29.43,44.38 31.53,44.38 arc7 31.64,44.39 38.9,45.28 arc-7 39,45.28 39.13,45.28 IC4.47
  Bottom 0.254: SW2.1A 15.87,45.93 16,45.93 arc-15 16.1,45.92 20.13,44.83 arc40 20.63,44.88 22.84,45.9 arc-25 23,45.93 23.13,45.93 SW2.1 24.24,45.68 24.24,45.55 v24.24,44.94
75  (via drill 0.4 pad 0.7)
  Top 0.254: v25.01,39.6 38.88,44.76 arc-20 39,44.78 39.13,44.78 IC4.48
  Bottom 0.254: SW1.1A 15.87,38.25 16,38.25 23,38.25 23.13,38.25 SW1.1 24.72,38.82 24.72,38.95 arc-28 24.76,39.13 v25.01,39.6
+3V3  (via drill 0.4 pad 0.7)
  Top 0.254: v58.53,40.7 53.36,36.54 arc-24 53.08,36.4 49.28,35.43 arc89 48.38,33.95 48.96,31.42 arc-17 48.98,31.21 48.86,29.55 arc-2 48.86,29.52 47.61,18.76 arc-55 47.42,18.47 45.02,17.18 arc62 44.24,15.88 arc-115 42.74,14.91 POWER.4 | IC2.11 22.72,30.28 22.85,30.28 arc-2 22.86,30.28 24.43,30.24 24.44,30.24 24.57,30.24 C21.2 25.21,30.24 25.34,30.24 arc7 25.38,30.24 26.87,30.43 arc-91 27.69,29.78 28.13,25.54 arc66 28.39,25.21 36.63,22.54 arc-42 36.84,22.37 POWER.4 | C28.2 37.91,9.41 38.04,9.41 arc4 38.06,9.41 38.82,9.46 arc-4 38.84,9.46 38.97,9.46 IC7.5 39.71,9.46 39.84,9.46 39.93,9.49 arc84 40.17,9.87 40.12,10.17 arc-21 40.12,10.65 40.17,10.95 arc10 40.18,11.01 arc-2 40.18,11.05 40.19,11.35 arc8 40.18,11.4 40.11,12.03 arc-59 40.34,12.57 | 40.34,12.57 | 40.34,12.57 arc31 40.41,12.67 40.54,13 arc20 40.57,13.13 POWER.4 | C20.2 60.04,46.16 59.91,46.16 arc54 59.6,46 v59.5,45.86
  Bottom 0.254: v59.5,45.86 59.39,44.33 arc-5 59.38,44.21 59.34,43.96 arc-26 59.12,43.41 arc8 59.08,43.33 arc-30 58.86,43.09 58.13,42.59 arc-34 58,42.55 | 58,42.55 57.87,42.55 | 57.87,42.55 IC5.9 57.87,42.55 | 57.87,42.55 58,42.55 | 58,42.55 arc-51 58.18,42.47 58.3,42.31 arc-33 58.38,42.12 v58.53,40.7 | D4.A 34.13,53.37 34.13,53.24 arc-54 33.98,52.93 27.39,48.09 arc39 27.11,47.69 26.45,45.19 arc-20 26.24,44.74 25.67,43.93 arc-41 24.65,43.24 22.91,42.82 arc8 22.86,42.8 16.33,40.22 arc-2 16.3,40.21 13.77,39.31 arc70 13.52,38.95 13.52,33.05 arc83 13.86,32.67 25.14,31.33 arc-73 25.48,31.02 25.74,29.49 arc39 26.14,28.77 POWER.4
+3V6  (via drill 0.4 pad 0.7)
  Top 0.254: C25.2 28.52,9.41 28.64,9.41 arc3 28.66,9.41 29.68,9.46 arc-3 29.7,9.46 29.82,9.46 IC6.5 30.32,9.24 30.32,9.11 arc90 30.7,8.73 34.09,8.73 | 34.09,8.73 | 34.09,8.73 38.04,8.73 39.84,8.73 arc53 40.15,8.89 40.48,9.34 arc43 40.64,9.9 40.59,10.32 arc-13 40.59,10.52 40.64,10.87 arc-23 40.74,11.17 40.85,11.36 arc-12 40.93,11.47 41.14,11.7 arc14 41.22,11.82 41.23,11.83 arc-21 41.28,11.9 41.6,12.17 41.94,12.47 arc5 41.96,12.49 44.24,14.84 arc44 44.66,15.88 arc-64 45.25,16.82 47.63,18.01 arc57 48.12,18.7 49.36,29.46 arc2 49.37,29.51 49.49,31.17 arc17 49.46,31.54 48.88,34.07 arc-89 49.41,34.94 53.21,35.91 arc24 53.66,36.13 58.42,39.85 arc-4 58.47,39.88 58.89,40.16 arc106 58.95,41.19 | 58.95,41.19 | 58.95,41.19 arc-43 58.73,41.61 v58.51,43.61 | C19.2 60.21,47.94 60.21,47.81 arc-71 60.01,47.53 v59.7,47.42
  Bottom 0.254: IC5.6 57.87,44.65 58,44.65 arc-51 58.18,44.56 58.3,44.41 arc-27 58.37,44.25 v58.51,43.61 v58.52,43.62 arc17 58.65,43.79 58.76,43.97 arc26 58.89,44.35 59.02,45.9 arc-28 59.1,46.12 59.1,46.12 arc4 59.13,46.16 59.5,46.84 arc20 v59.7,47.41 v59.7,47.42
+5V
  Top 0.254: 36.24,54.82 36.41,55.01 arc-48 36.63,55.11 36.76,55.11 C3.1 | 60.71,42.87 arc-42 60.83,42.66 60.89,42.29 arc-7 60.89,42.24 61.03,37.89 arc9 61.03,37.84 61.08,37.59 arc80 61.41,37.31 arc-44 61.96,37.09 62.27,36.79 arc-46 62.39,36.52 62.39,33.59 arc-46 62.27,33.31 61.96,33.01 arc-44 61.41,32.79 arc79 61.08,32.52 60.88,31.48 arc-56 60.66,31.2 59.02,30.51 arc11 58.89,30.45 52.47,26.09 arc32 52.21,25.77 51.85,24.95 arc24 51.83,24.83 51.83,24.71 R25.1 51.83,24.06 51.83,23.93 arc-30 51.79,23.78 48.44,18.1 arc-18 48.16,17.76 47.28,16.99 arc54 46.79,15.73 47.38,9.78 arc84 47.73,9.46 | 60.71,42.87 | 60.71,42.87 arc-28 60.38,43.3 60.23,43.63 arc-24 60.21,43.75 60.21,43.87 C31.1 60.04,44.27 59.91,44.27 arc-16 59.8,44.28 59.1,44.49 arc-7 58.92,44.55 arc4 58.86,44.58 57.91,44.92 arc-17 57.48,45.15 56.72,45.71 arc36 56.5,45.78 56.38,45.78 IC4.80 55.13,45.78 55,45.78 arc81 54.65,45.48 54.62,45.34 arc4 54.62,45.31 54.27,41 arc-64 54.03,40.68 51.71,39.75 arc-36 51.26,39.72 48.39,40.44 arc4 48.36,40.45 47.05,40.68 arc-80 46.75,41.03 | R24.2 29.56,45.75 29.43,45.75 27.82,45.75 arc-13 27.44,45.8 24.23,46.51 arc-72 22.92,47.99 | 22.92,47.99 | 22.92,47.99 arc12 22.87,48.23 21.84,51.49 arc-6 21.8,51.66 21.61,52.6 arc-22 21.6,53.26 22.2,56.56 arc68 21.33,58.51 9.95,65.66 arc-90 9.52,67.53 CON11.2 12.49,70.49 arc-37 13.31,70.69 14.37,70.61 arc4 14.48,70.6 14.69,70.6 arc6 14.83,70.61 15.62,70.69 arc-56 16.78,70.21 17.73,69.08 arc10 17.89,68.93 19.03,67.98 arc40 19.27,67.89 19.4,67.89 R4.2 19.57,67.5 19.57,67.37 arc27 19.6,67.23 20.11,66.22 arc83 21.65,65.62 23.13,66.16 arc-36 24.45,66.22 26.81,65.56 arc-75 27.9,64.14 arc31 28.05,63.58 28.35,63.09 arc-71 28.3,62.25 27.41,61.17 arc-19 27.32,61.09 26.92,60.83 arc58 26.74,60.51 26.74,60.38 R6.2
  Top 0.254: C30.1 46.49,39.95 46.49,40.07 arc-17 46.51,40.16 46.74,40.93 arc17 46.75,41.03 | 46.75,41.03 46.75,41.16 | 46.75,41.16 IC4.61 | IC7.3 41.57,11.36 41.44,11.36 41.33,11.28 arc-4 41.28,11.24 | 41.28,11.24 | 41.28,11.24 arc41 41.17,11.08 41.11,10.85 arc11 41.1,10.79 41.08,10.44 arc6 41.08,10.4 41.1,9.88 arc-3 41.1,9.81 arc74 41.35,9.49 41.44,9.46 41.57,9.46 IC7.1 42.31,9.46 42.44,9.46 arc-3 42.46,9.46 43.48,9.41 arc3 43.49,9.41 43.62,9.41 C29.2 44.27,9.41 44.39,9.41 45.78,9.41 45.91,9.41 C22.2 46.55,9.41 46.68,9.41 arc3 46.69,9.41 47.71,9.46 arc-3 47.73,9.46 | 47.73,9.46 47.86,9.46 | 47.86,9.46 IC3.5 47.86,9.46 | 47.86,9.46 47.73,9.46 | R22.1 58.77,60.27 58.64,60.27 58.63,60.27 53.02,60.37 arc9 52.83,60.36 50.38,60.02 arc-8 50.33,60.01 50.2,60.01 C5.1 50.03,59.62 50.03,59.49 arc-50 49.92,59.27 49.38,58.81 arc50 49.25,58.53 49.25,58.41 IC4.10 49.25,57.16 49.25,57.03 arc-35 49.23,56.95 46.52,53.05 arc-17 46.37,52.89 45.29,52.05 arc-4 45.25,52.02 44.96,51.83 | 46.75,41.03 46.75,41.16 | 46.75,41.16 IC4.61 | IC4.61 46.75,42.41 46.75,42.53 arc11 46.74,42.6 44.96,51.83 | 44.96,51.83 44.63,51.93 arc-12 44.48,51.99 42.08,53.34 arc37 41.63,53.42 40.55,53.29 arc-7 40.5,53.28 40.38,53.28 IC4.31 39.13,53.28 39,53.28 arc-47 38.37,53.56 37.81,54.16 arc39 37.59,54.28 36.58,54.43 arc-69 36.26,54.72 36.24,54.82 | R6.2 26.99,60.21 27.12,60.21 arc-48 27.34,60.11 28.54,58.76 arc48 28.76,58.66 28.89,58.66 R2.1 29.28,58.84 29.28,58.96 arc-26 29.32,59.13 30.04,60.64 arc-33 30.31,60.94 31.55,61.71 arc-160 32.51,60.64 31.66,59.56 arc-19 31.36,59.28 31.35,59.28 arc57 31.18,58.97 31.17,58.67 31.17,58.66 31.17,58.36 arc82 31.5,57.98 32.51,57.84 arc-82 32.84,57.46 32.84,57.16 32.83,56.86 arc-12 32.83,56.78 32.83,56.78 arc81 33.28,55.95 36.24,54.82
  Top 0.254: R5.2 24.45,60.21 24.58,60.21 26.22,60.21 26.35,60.21 R6.2
  pour Top: 41.02,56.52 54.36,56.52 54.36,43.31 41.02,43.31
+5VP
  Top 0.254: R25.2 53.5,24.32 53.63,24.32 arc-13 53.71,24.31 59.61,23 arc13 59.69,22.99 59.82,22.99 R27.1 60.07,21.97 60.07,21.84 arc-5 60.07,21.81 59.56,15.78 arc-21 59.45,15.38 58.24,12.89 arc-64 57.94,12.7 55.74,12.7 arc-45 55.5,12.8 51.61,16.68 arc47 50.76,17.02 48.23,16.93 arc140 47.61,15.04 49.31,13.7 arc-52 49.46,13.4 49.46,12.5 arc-6 49.46,12.46 49.11,9.07 arc-81 48.75,8.73 39.89,8.23 arc-3 39.84,8.22 38.04,8.22 34.09,8.22 30.7,8.22 arc-10 30.54,8.24 27.68,8.73 arc-60 27.39,8.98 26.91,10.31 arc-20 26.86,10.61 26.86,11.21 arc-56 27.24,11.94 27.86,12.36 27.86,12.37 30.23,13.97 arc-20 30.35,14.03 33.3,14.77 arc13 33.53,14.85 POWER.2 | Y2.+ 13.84,55.5 13.84,55.37 arc26 13.88,55.2 18.53,45.78 arc16 18.59,45.7 24.46,39.11 arc55 25.1,38.87 29.83,39.43 arc-7 29.94,39.44 37.65,39.44 arc-41 38.23,39.22 38.75,38.78 arc-49 38.85,38.55 38.85,38.42 C10.1 | POWER.2 38.37,11.41 arc-32 38.42,11.21 38.42,10.61 arc-82 38.1,10.23 37.09,10.09 arc10 37.02,10.07 35.09,9.43 arc-18 34.99,9.41 34.87,9.41 C26.2 34.22,9.41 34.09,9.41 arc-4 34.07,9.41 33.32,9.46 arc4 33.3,9.46 33.17,9.46 IC6.1 | IC6.3 32.91,11.59 32.91,11.71 arc-33 32.98,11.92 33.73,13.07 POWER.2 | C15.+ 46.36,21.43 46.24,21.43 arc-11 46.17,21.43 42.88,22.05 arc11 42.81,22.06 42.68,22.06 C2.1 | L1.2 35.56,19.9 35.56,19.78 POWER.2 | C10.1 38.85,37.78 38.85,37.65 38.85,36.52 38.85,36.39 R12.2 | C10.1 38.68,38.17 38.55,38.17 arc-58 38.23,38.35 37.97,38.75 arc58 37.65,38.93 29.94,38.93 arc79 29.57,38.63 28.45,33.12 arc11 28.43,32.94 28.43,31.67 arc67 28.98,30.85 29.19,30.76 arc23 29.32,30.73 31.52,30.73 arc-25 31.66,30.7 36.67,28.32 arc-65 36.89,27.98 36.89,25.58 arc-3 36.89,25.55 36.88,25.35 arc52 37.12,24.77 38.47,23.56 arc-48 38.6,23.28 38.6,23.15 C11.1 39.89,22.48 40.02,22.48 41.01,22.48 41.14,22.48 C2.1
  Top 0.254: C2.1 42.43,21.8 42.43,21.68 arc7 42.43,21.63 POWER.5
  Bottom 0.254: POWER.5 41.15,14.85 arc-27 40.64,14.73 38.1,14.73 arc-27 37.59,14.85 POWER.2
  pour Top: 36.45,22.23 37.59,23.37 43.69,23.37 45.34,21.72 47.24,21.72 47.24,18.92 37.34,18.92 36.45,19.81
+5VP_O
  Top 0.254: R27.2 62.61,22.27 62.74,22.27 63.96,22.27 arc29 64.55,22.42 CON2.5 | CON2.41 CON2.38 | CON2.26 CON2.23
  Bottom 0.254: CON2.50 CON2.47 CON2.44 CON2.41 | CON2.38 CON2.35 CON2.32 CON2.29 CON2.26 | CON2.23 CON2.20 CON2.17 CON2.14 CON2.11 CON2.8 CON2.5
ADC0  (via drill 0.4 pad 0.7)
  Top 0.254: IC4.89 55.13,50.28 55,50.28 arc-56 54.7,50.44 v54.39,50.9
  Bottom 0.254: v54.39,50.9 53.79,50.76 arc42 53.35,50.47 50.87,46.98 arc14 50.67,46.62 50.2,45.42 arc24 50.05,44.48 50.11,43.26 arc-3 50.12,43.15 50.14,37.1 arc15 50.23,36.38 50.74,34.54 arc-28 50.75,33.98 50.58,33.16 arc-9 50.54,33.04 49.73,31 arc47 49.79,28.85 CON1.1
ADC1  (via drill 0.4 pad 0.7)
  Top 0.254: IC4.88 55.13,49.78 55,49.78 arc-16 54.77,49.82 v53.95,50.05
  Bottom 0.254: v53.95,50.05 51.32,46.74 arc17 51.14,46.43 50.67,45.24 arc24 50.55,44.51 50.62,43.28 arc-3 50.62,43.15 50.65,37.1 arc14 50.72,36.54 51.21,34.65 arc-25 51.23,33.92 51.08,33.08 arc-11 51.01,32.85 50.2,30.82 arc48 50.28,29.01 52.23,25.15 arc7 52.27,25.07 CON1.2
ADC2  (via drill 0.4 pad 0.7)
  Top 0.254: IC4.87 55.13,49.28 55,49.28 arc-3 54.94,49.28 54.14,49.32 arc128 53.52,48.16 v53.88,47.66
  Bottom 0.254: v53.88,47.66 52.85,45.69 arc-57 52.32,45.33 52.23,45.32 arc100 51.6,44.4 52.63,40.77 arc-25 52.66,40.23 52.18,37.23 arc22 52.19,36.95 52.64,34.9 arc-18 52.7,33.92 52.61,33.04 arc-16 52.43,32.29 51.62,30.25 arc53 51.67,29.65 53.44,26.69 arc14 53.72,26.33 | 53.72,26.33 | 53.72,26.33 arc-11 53.87,26.16 CON1.3
ADC3  (via drill 0.4 pad 0.7)
  Top 0.254: IC4.86 56.38,48.78 56.5,48.78 arc49 56.61,48.83 56.72,48.95 arc43 56.79,49.15 56.78,49.28 arc-153 57.96,49.6 58.43,48.74 arc46 58.87,48.39 v59.07,48.33
  Bottom 0.254: v59.07,48.33 59.88,48.13 arc-62 60.41,47.6 62.78,38.42 arc59 63.62,37.56 64.3,37.36 arc-74 65.18,36.19 65.18,18.41 arc-39 64.91,17.65 CON1.4
ADC4  (via drill 0.4 pad 0.7)
  Top 0.254: IC4.85 56.38,48.28 56.5,48.28 arc78 57.34,48.97 57.37,49.1 arc1 57.38,49.12 v57.41,49.3
  Bottom 0.254: v57.41,49.3 v57.41,49.31 arc-8 57.46,49.55 57.92,51.17 arc-110 58.99,51.55 | 58.99,51.55 | 58.99,51.55 arc16 59.17,51.45 59.67,51.28 arc-47 60.1,50.88 61.3,48.12 arc-6 61.37,47.95 62.8,43.44 arc56 63.62,42.64 64.3,42.44 arc-57 65.13,41.61 65.33,40.93 arc57 66.16,40.1 66.84,39.9 arc-74 67.72,38.73 67.72,18.41 arc-39 67.45,17.65 CON1.5
ADC5  (via drill 0.4 pad 0.7)
  Top 0.254: IC4.84 55.13,47.78 55,47.78 arc-48 54.74,47.9 v54.11,48.59
  Bottom 0.254: v54.11,48.59 53.55,48.31 arc20 53.35,48.16 51.75,46.47 arc22 51.62,46.25 51.15,45.05 arc37 51.11,44.26 52.14,40.63 arc-25 52.16,40.31 51.68,37.31 arc22 51.69,36.83 52.16,34.83 arc-20 52.21,33.9 52.1,33.02 arc-14 51.95,32.48 51.15,30.44 arc53 51.23,29.38 53.03,26.43 arc14 53.38,25.98 | 53.38,25.98 | 53.38,25.98 arc-13 53.48,25.86 59.39,16.48 arc-6 59.45,16.37 59.93,15.38 arc64 60.96,14.73 66.04,14.73 arc27 66.55,14.85 CON1.6
ADC6  (via drill 0.4 pad 0.7)
  Top 0.254: v59.07,49.09 59.43,48.58 arc-112 59.17,47.9 58.22,47.68 56.59,47.29 arc-13 56.5,47.28 56.38,47.28 IC4.83
  Bottom 0.254: CON2.27 62.69,42.64 arc-25 62.31,43.29 60.88,47.8 arc44 60.28,48.51 59.41,48.98 arc12 59.27,49.03 v59.07,49.09
ADC7
  Top 0.152: 60.37,44.96 60.6,44.87 arc-68 60.75,44.65 60.75,43.75 arc42 60.92,43.3 61.08,43.13
  Top 0.254: CON2.24 62.89,40.69 arc-14 62.78,40.97 62.33,42.7 arc76 62.01,42.95 61.76,42.95 61.75,42.95 61.72,42.95 arc-20 61.45,42.99 61.18,43.09 arc-9 61.09,43.13 61.08,43.13 | IC4.82 56.38,46.78 56.5,46.78 arc-47 56.77,46.67 57.16,46.25 arc-4 57.19,46.2 57.55,45.76 arc27 58,45.41 59.09,44.94 arc42 59.82,44.9 | 59.82,44.9 | 59.82,44.9 arc-6 59.85,44.91 60.14,44.97 arc-21 60.26,44.98 60.37,44.96
ADC8
  Top 0.152: 61.08,55 61.29,54.75 arc-17 61.36,54.64 61.42,54.49 arc5 61.46,54.42 61.46,54.41 arc-13 61.56,54.15
  Top 0.254: CON2.51 62.89,59.63 arc16 62.77,59.32 61.62,54.3 arc-14 61.56,54.15 | IC4.97 56.38,54.28 56.5,54.28 arc3 56.59,54.29 57.39,54.34 arc20 57.61,54.39 58.3,54.68 arc-22 59.33,54.91 59.83,54.92 arc-2 59.91,54.92 59.92,54.92 60.14,54.92 60.15,54.92 60.16,54.92 60.34,54.92 arc-5 60.42,54.92 60.43,54.92 60.57,54.92 60.73,54.91 arc17 60.81,54.92 61.08,55
ADC9
  Top 0.152: 60.94,54.46 61.02,54.39 arc-10 61.17,54.22 61.35,53.99 arc111 61.79,54.01 62.3,54.86
  Top 0.254: CON2.48 62.89,57.09 arc15 62.78,56.8 62.3,54.86 | IC4.96 56.38,53.78 56.5,53.78 arc8 56.75,53.8 57.5,53.9 arc21 57.88,54.02 58.26,54.23 arc-25 59.27,54.52 59.28,54.52 60.11,54.56 arc-1 60.15,54.56 60.16,54.56 60.17,54.56 60.33,54.57 arc-11 60.47,54.56 60.7,54.53 arc-8 60.76,54.52 60.94,54.46
ADC10
  Top 0.152: 60.64,54.14 60.73,54.1 arc-6 60.83,54.04 60.97,53.95 arc-3 61.02,53.91 61.27,53.74 arc38 61.58,53.64 61.73,53.65
  Top 0.254: CON2.45 62.71,54.59 arc-11 62.65,54.52 61.94,53.78 arc-27 61.73,53.65 | IC4.95 56.38,53.28 56.5,53.28 arc12 57,53.34 57.68,53.48 arc17 58.11,53.65 58.43,53.83 arc-19 59.05,54.05 59.51,54.13 arc-4 59.65,54.15 60.05,54.2 arc-5 60.16,54.21 60.17,54.21 arc2 60.21,54.21 60.33,54.22 arc-25 60.49,54.2 60.64,54.14
ADC11
  Top 0.152: CON2.42 61.8,53.4 arc-21 61.7,53.39 61.48,53.41 arc-15 61.29,53.46 60.5,53.77 arc-9 60.44,53.79 60.36,53.84
  Top 0.254: IC4.94 56.38,52.78 56.5,52.78 arc17 57.35,52.91 57.94,53.1 arc13 58.35,53.28 58.63,53.44 arc-14 58.97,53.58 59.38,53.7 arc-4 59.52,53.74 59.62,53.76 arc-1 59.65,53.77 60.01,53.83 arc-9 60.18,53.85 60.18,53.85 arc-6 60.22,53.85 60.36,53.84
ADC12
  Top 0.152: 60.19,53.47 60.27,53.45 arc2 60.32,53.44 60.37,53.42 arc-10 60.48,53.39 | 60.48,53.39 | 60.48,53.39 arc13 60.73,53.31 61.38,53.19 arc7 61.51,53.18 61.7,53.17 arc8 61.77,53.17 61.98,53.18 arc-5 62.01,53.19 arc-48 62.59,52.93 CON2.39
  Top 0.254: IC4.93 56.38,52.28 56.5,52.28 arc23 57.82,52.55 58.3,52.76 arc8 58.61,52.91 58.83,53.05 arc-12 59.03,53.15 59.7,53.38 arc-9 59.79,53.41 60.08,53.46 arc-9 60.19,53.47
ADC13
  Top 0.152: 60.2,53.06 | 60.2,53.06 arc-15 60.27,53.05 60.56,52.99 60.56,52.99 arc11 60.86,52.94 61.42,52.91 arc-37 61.5,52.88 | 61.5,52.88
  Top 0.254: CON2.36 62.9,50.86 arc-11 62.81,51.08 62.38,52.5 arc16 62.33,52.6 62.16,52.87 arc59 62,52.95 61.75,52.94 arc-3 61.72,52.94 61.71,52.94 arc20 61.66,52.93 61.5,52.88 | IC4.92 56.38,51.78 56.5,51.78 arc31 58.48,52.33 59.06,52.68 arc-9 59.15,52.72 59.22,52.75 arc3 59.34,52.8 59.8,53.01 arc-21 59.89,53.04 60.19,53.06 arc-2 60.2,53.06 | 60.2,53.06
ADC14
  Top 0.254: CON2.33 62.89,48.3 arc-18 62.76,48.67 62.37,50.81 arc83 61.99,51.11 61.46,51.08 arc-3 61.41,51.08 arc79 61.08,50.8 60.88,49.77 arc-79 60.51,49.46 60.21,49.46 arc-30 60.02,49.51 59.8,49.64 arc-18 59.74,49.69 | 59.74,49.69 | 59.74,49.69 arc24 59.44,49.91 58.33,50.41 arc-11 58.23,50.47 arc7 58.08,50.56 56.91,51.18 arc28 56.5,51.28 56.38,51.28 IC4.91
ADC15
  Top 0.254: CON2.30 62.08,43.42 arc-12 62.01,43.41 61.76,43.41 arc1 61.74,43.41 61.72,43.41 arc-10 61.66,43.42 61.36,43.46 arc-80 61.12,43.74 61.12,44.26 61.12,44.27 61.12,44.65 arc46 60.93,45.09 60.7,45.31 arc46 60.35,45.44 60.18,45.43 arc28 59.81,45.32 | 59.81,45.32 | 59.81,45.32 arc-59 59.2,45.32 58.15,45.9 arc-125 58.18,47.16 59.36,47.73 arc71 59.73,48.4 59.65,49.16 arc63 59.27,49.64 58.24,50.02 arc-15 58,50.14 arc11 57.82,50.24 56.65,50.75 arc24 56.5,50.78 56.38,50.78 IC4.90
AREF  (via drill 0.4 pad 0.7)
  Top 0.254: IC4.98 56.38,54.78 56.5,54.78 arc17 56.75,54.82 v57.35,55 57.75,55.21 arc-7 v58.14,55.39 58.5,55.53 arc-21 58.64,55.56 58.77,55.56 C6.1
  Bottom 0.254: JP6.3 29.99,60.14 arc63 30.55,59.61 31.57,59.38 arc11 31.89,59.34 40.5,59.11 arc16 40.98,59.17 43.35,59.77 arc-38 43.82,59.73 52.89,55.76 arc14 53.06,55.71 v57.35,55
AVCC
  Top 0.254: R22.2 60.44,59.88 60.44,59.75 arc-39 60.17,58.99 59.85,58.6 arc7 59.83,58.57 59.56,58.16 arc-57 59.24,57.98 59.11,57.98 C4.1 58.77,57.84 58.64,57.84 arc36 58.42,57.77 56.28,56.23 arc54 56.12,55.92 56.12,55.8 IC4.100
DTR
  Top 0.254: IC2.33 16.08,33.78 16.08,33.65 arc-78 15.78,33.28 13.49,32.78 arc-12 13.3,32.76 11.26,32.76 11.01,32.76 arc-12 10.82,32.78 10.82,32.78 arc12 10.67,32.8 8.8,32.82 arc-89 8.42,33.2 8.38,66.8 arc-9 8.41,67.14 8.79,69.63 arc-73 10.39,71.23 12.88,71.59 arc-8 13.21,71.62 14.48,71.62 | 14.48,71.62 | 14.48,71.62 14.69,71.62 15.75,71.62 arc-2 15.82,71.62 21.4,71.44 arc-3 21.44,71.44 27.52,70.93 arc-53 27.81,70.76 28.07,70.35 arc58 28.39,70.17 28.52,70.17 R7.1 28.69,69.78 28.69,69.65 28.69,68.27 28.69,68.14 C7.1
GND  (via drill 0.4 pad 0.7)
  Top 0.254: v36.08,53.82 36.51,53.63 arc24 36.63,53.61 36.76,53.61 C3.2 | 55,46.28 arc72 54.18,45.69 53.88,44.73 arc-50 53.46,44.28 52.58,43.92 arc-13 52.42,43.88 v47.86,43.14 47.41,42.83 arc56 47.25,42.53 47.25,42.41 IC4.62 | 55,46.28 55.13,46.28 | 55.13,46.28 IC4.81 55.13,46.28 | v37.28,32.68 36.74,32.64 arc-4 36.72,32.64 36.59,32.64 IC1.3 34.65,32.64 34.52,32.64 arc-81 34.22,32.89 33.8,35.57 arc-9 33.79,35.62 33.79,35.74 R13.1 33.62,36.14 33.49,36.14 arc-62 33.16,36.34 32.38,37.83 arc62 32.04,38.03 31.91,38.03 R14.1 | v69.73,45.08 63.95,45.03 arc25 63.43,44.91 62.17,44.3 arc-26 62.01,44.27 61.88,44.27 C31.2 61.71,44.52 61.71,44.65 61.71,45.78 61.71,45.91 C20.1 61.71,46.55 61.71,46.68 61.71,47.81 61.71,47.94 C19.1 | C32.2 65.86,12.61 65.86,12.73 arc-26 65.89,12.9 67.55,16.37 arc-66 68.61,17.02 v69.36,17 | v55.76,66.23 56.04,66.05 arc122 56.62,66.38 56.62,66.5 IC9.8 58.32,66.67 58.44,66.67 arc-13 58.51,66.67 61.36,66 arc13 61.44,65.99 63.64,65.99 arc26 63.81,66.03 64.67,66.44 arc18 64.85,66.57 65.85,67.51 arc47 65.97,67.78 65.97,67.91 C33.2 | IC8.8 56.12,9.35 56.12,9.22 arc-20 56.09,9.09 v55.93,8.65 | T1.2 21.39,47.23 21.39,47.35 21.41,47.43 arc-27 21.48,47.59 v21.72,47.87 | IC2.12 21.68,31.52 21.55,31.52 arc-34 21.34,31.59 18.77,33.34 arc-56 18.61,33.65 18.61,33.78 IC2.29 18.59,34.82 18.59,34.95 arc86 18.24,35.33 v15.5,35.53 12.76,35.33 arc86 12.41,34.95 12.41,34.82 IC2.28 | IC2.1 21.93,18.03 21.93,17.9 arc-2 21.93,17.89 v21.91,17.3 | C30.2 47.99,39.3 47.99,39.17 arc-16 47.98,39.09 v47.84,38.58 | C27.1 41.39,12.88 41.39,12.76 arc-59 41.24,12.5 41.04,12.38 arc10 40.93,12.3 v40.7,12.1
  Top 0.254: IC7.2 42.31,10.41 42.44,10.41 arc29 42.61,10.46 43.34,10.87 arc-29 43.49,10.91 43.62,10.91 C29.1 44.27,10.91 44.39,10.91 45.78,10.91 45.91,10.91 C22.1 46.16,11.08 46.16,11.21 arc5 46.16,11.25 POWER.6 | C28.1 37.27,10.91 37.14,10.91 34.99,10.91 34.87,10.91 C26.1 34.22,10.91 34.09,10.91 arc42 33.89,10.83 33.53,10.51 arc-42 33.3,10.41 33.17,10.41 IC6.2 32.42,10.41 32.3,10.41 arc-83 31.95,10.72 31.92,10.97 arc-7 31.91,11.01 31.91,11.71 arc-20 31.94,11.84 32.23,12.66 arc20 32.25,12.76 32.25,12.88 C24.1 | C25.1 28.26,11.08 28.26,11.21 arc-64 28.48,11.55 29.53,12.06 arc-14 29.62,12.09 31.12,12.38 arc47 31.37,12.55 31.62,12.96 arc-58 31.95,13.14 32.07,13.14 C24.1 | C24.1 32.42,13.28 32.55,13.28 arc21 32.68,13.3 v33.12,13.47 | v53.87,10.76 53.36,10.9 arc15 53.28,10.91 53.16,10.91 C23.1 52.51,10.91 52.38,10.91 arc29 52.23,10.87 51.5,10.46 arc-29 51.33,10.41 51.2,10.41 IC3.2 50.46,10.41 50.33,10.41 arc-83 49.98,10.72 49.95,10.97 arc-7 49.95,11.01 49.95,11.71 arc-28 49.99,11.89 50.24,12.36 arc28 50.28,12.5 50.28,12.63 C13.1 50.28,13.28 50.28,13.4 arc41 50.21,13.6 POWER.7 | C21.1 24.82,31.91 24.82,32.04 arc87 24.46,32.42 v23.99,32.44 | v61.56,28.93 61.7,29.44 arc15 61.71,29.52 61.71,29.65 C18.1 61.71,30.3 61.71,30.42 61.71,31.55 61.71,31.68 R16.1 | C15.- 46.74,26.28 46.74,26.41 46.74,27.7 46.74,27.82 C14.- 46.36,28.88 46.24,28.88 42.81,28.88 42.68,28.88 C12.2 41.14,28.57 41.01,28.57 40.02,28.57 39.89,28.57 C8.2 | C11.2 38.34,25.31 38.22,25.31 v37.61,25.31 | C11.2 39.12,25.95 39.12,26.08 39.12,27.77 39.12,27.9 C8.2 | C8.2 38.34,28.99 38.22,28.99 arc-16 38.11,29.01 36.62,29.43 arc-74 36.34,29.8 36.34,29.93 IC1.1
  Top 0.254: C2.2 41.14,25.28 41.01,25.28 40.02,25.28 39.89,25.28 C11.2 | 55.13,46.28 55,46.28 | 55,46.28 arc-28 54.83,46.33 53.54,47.01 arc-44 53.19,47.43 52.93,48.2 arc-32 52.91,48.89 53.24,50.23 arc-2 53.25,50.26 54.66,55.03 arc-74 55,55.28 55.13,55.28 IC4.99 56.38,55.28 56.5,55.28 arc9 56.52,55.29 56.56,55.29 arc25 56.7,55.35 57.06,55.59 arc-3 57.25,55.71 57.76,56.02 arc-1 57.78,56.03 58.45,56.41 arc-30 58.64,56.46 59.24,56.46 arc-58 59.56,56.28 59.82,55.87 arc54 60.11,55.7 60.12,55.7 60.14,55.7 60.27,55.7 C6.2 60.44,55.95 60.44,56.08 60.44,57.46 60.44,57.59 C4.2 | v41.43,51.88 41.31,52.15 arc13 41.21,52.32 41.21,52.32 arc-4 41.18,52.36 arc17 41.03,52.54 40.92,52.63 arc41 40.5,52.78 40.38,52.78 IC4.32 39.13,52.78 39,52.78 arc47 38.74,52.67 38.35,52.25 arc31 38.13,51.83 37.92,50.82 arc-78 37.58,50.55 37.45,50.55 Y1.2 | R7.2 27.02,70.17 26.89,70.17 arc-8 26.84,70.18 21.42,70.93 arc8 21.37,70.94 20.77,70.94 arc58 20.45,70.76 20.19,70.35 arc-58 19.87,70.17 19.74,70.17 C1.2 19.4,70.03 19.27,70.03 arc16 19.16,70.02 v18.68,69.88 | IC4.11 48.75,58.41 48.75,58.53 arc20 48.65,59.1 48.54,59.39 arc-20 48.53,59.49 48.53,59.62 C5.2 48.35,60.01 48.23,60.01 v47.87,60.03